# Altium PCB 21FX_revd.PcbDoc
Units mil, origin at the board's own origin, x right, y up, seen from the top; angles counter-clockwise.
Board outline 2089 x 1245 mil, 2 copper layers (Top Layer, Bottom Layer); 44 components, 68 nets, 346 pads, 0 vias.
Unrouted connection lines stored in the file: 133.
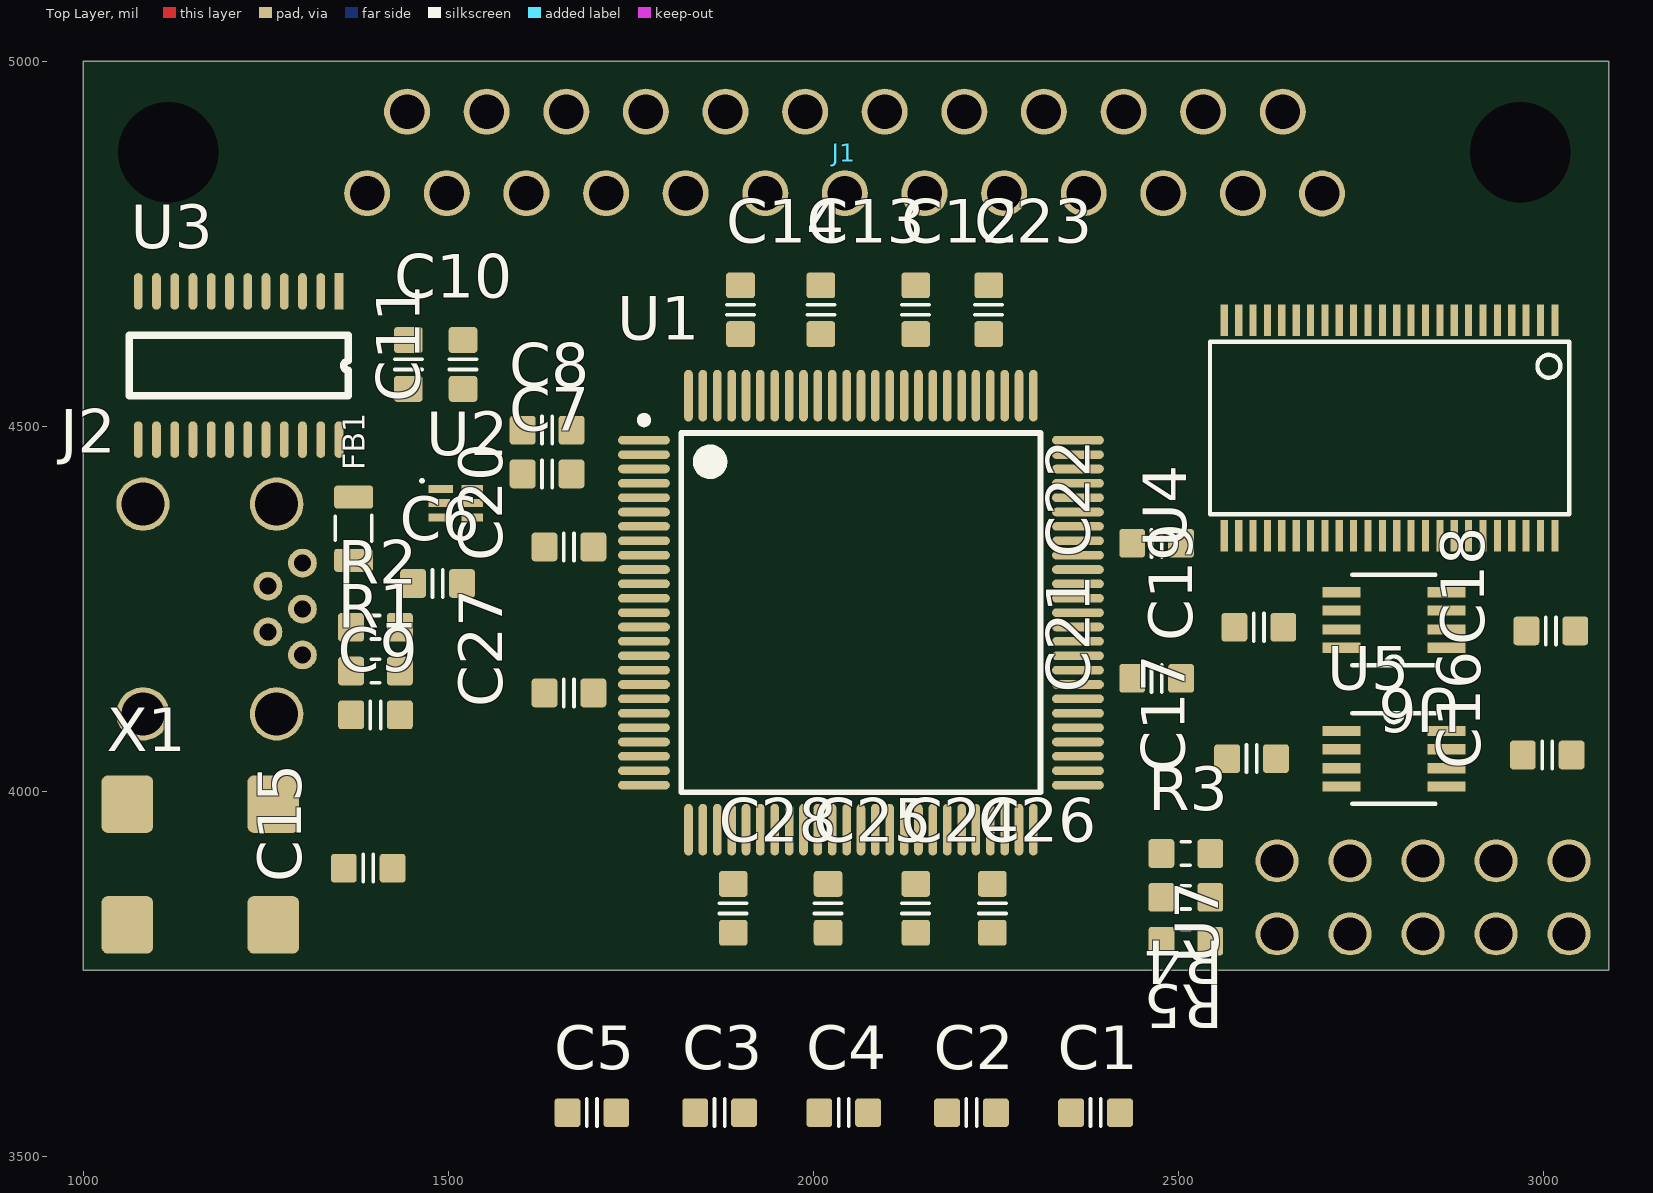
[diagram p0: Top Layer view]
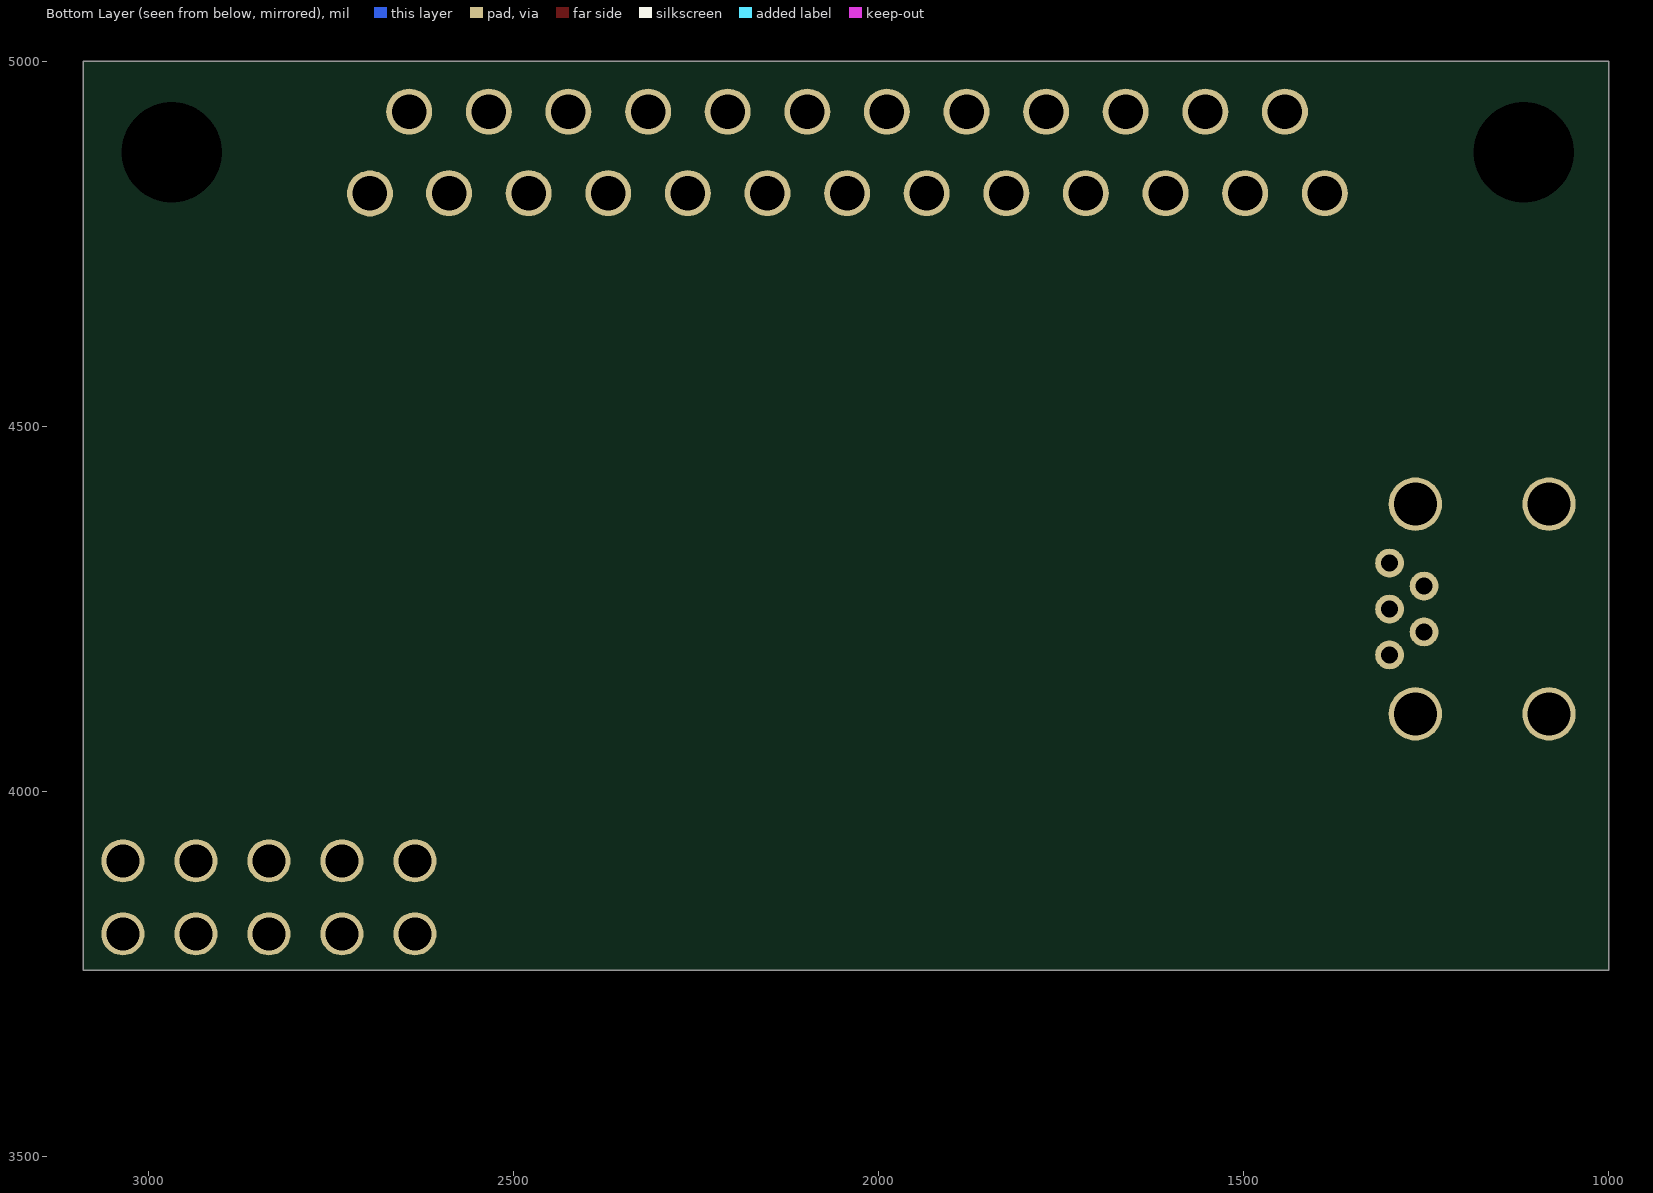
[diagram p1: Bottom Layer view, seen from below]

## Layer stack, top to bottom
Top Solder: solder mask 0.4, Solder Resist, Dk 3.5
Top Layer: signal copper 1.4
Dielectric 1: dielectric 12.6, FR-4, Dk 4.8
Bottom Layer: signal copper 1.4
Bottom Solder: solder mask 0.4, Solder Resist, Dk 3.5

## Board outline
1000,3755 3089,3755 3089,5000 1000,5000

## Design rules (kind name [scope] priority, off if disabled: settings)
Clearance [All] p1: gap=10
PolygonConnect [All] p1: connectstyle=Relief reliefconductorwidth=10 reliefentries=4 polygonreliefangle="90 Angle" airgapwidth=10
RoomDefinition 21FX_revd_power [InComponentClass('21FX_revd_power')] p1: confinementstyle=ConfineIn formatcopy=TRUE lockcomponents=FALSE outline 3830,2995 4140,2995 4140,3265 3830,3265
RoomDefinition 21FX_revd [InComponentClass('21FX_revd')] p2: confinementstyle=ConfineIn formatcopy=TRUE lockcomponents=FALSE outline 3450,3910 3720,3910 3720,4970 3450,4970
RoutingVias [All] p1: holewidth=28 width=50 viastyle="Through Hole" minholewidth=28 minwidth=50 maxholewidth=28 maxwidth=50
SolderMaskExpansion [All] p1: expansion=4
Width [All] p1: maxlimit=10 minlimit=10 preferedwidth=10
30 further rules are at their usual default settings.

## Classes and differential pairs
component class 21FX_revd: C20 C21 C22 C23 C24 C25 C26 C27 C28 J1 U1 U4 U5 U6 U? X1
component class 21FX_revd_power: C1 C2 C3 C4 C5 C6 C7 C8 C9 C10 C11 C12 C13 C14 C15 C16 C17 C18 C19 FB1 J2 R1 R2 R3 R4 R5 U2 U3 U7

## Components (designator, comment, footprint, x,y, rotation, side; value= is the part's Value field where it differs from the comment)
C1 "approved sub OK" CAPC1608X90N 2386.38,3560 r0 top
C2 "approved sub OK" CAPC1608X90N 2216.38,3560 r0 top
C3 "Value" CAPC1608X90N 1871.38,3560 r0 top
C4 "Value" CAPC1608X90N 2041.38,3560 r0 top
C5 "Value" CAPC1608X90N 1696.38,3560 r0 top
C6 "approved sub OK" CAPC1608X90N 1485,4285 r0 top
C7 "approved sub OK" CAPC1608X90N 1635,4435 r0 top
C8 "Value" CAPC1608X90N 1635,4495 r0 top
C9 "Value" CAPC1608X90N 1400,4105 r0 top
C10 "approved sub OK" CAPC1608X90N 1445,4585 r90 top
C11 "approved sub OK" CAPC1608X90N 1520,4585 r90 top
C12 "approved sub OK" CAPC1608X90N 2140,4660 r90 top
C13 "approved sub OK" CAPC1608X90N 2010,4660 r90 top
C14 "approved sub OK" CAPC1608X90N 1900,4660 r90 top
C15 "approved sub OK" CAPC1608X90N 1390,3895 r180 top
C16 "approved sub OK" CAPC1608X90N 3005,4050 r180 top
C17 "approved sub OK" CAPC1608X90N 2600,4045 r180 top
C18 "approved sub OK" CAPC1608X90N 3010,4220 r180 top
C19 "approved sub OK" CAPC1608X90N 2610,4225 r180 top
C20 "approved sub OK" CAPC1608X90N 1665,4335 r180 top
C21 "approved sub OK" CAPC1608X90N 2470,4155 r180 top
C22 "approved sub OK" CAPC1608X90N 2470,4340 r180 top
C23 "approved sub OK" CAPC1608X90N 2240,4660 r90 top
C24 "approved sub OK" CAPC1608X90N 2140,3840 r90 top
C25 "approved sub OK" CAPC1608X90N 2020,3840 r90 top
C26 "approved sub OK" CAPC1608X90N 2245,3840 r90 top
C27 "approved sub OK" CAPC1608X90N 1665,4135 r180 top
C28 "approved sub OK" CAPC1608X90N 1890,3840 r90 top
FB1 "Value" FBC2012N 1370,4360 r90 top
J1 "SNES_EXP_DB25" DB-25_RA_MPLUG 2806,3894 r180 top
J2 "USB_Mini-B_TH" USB_MINI-B_WURTH-TH 1300,4250 r90 top
R1 "Thick Film" RESC1608X55N 1400,4165 r0 top
R2 "Thick Film" RESC1608X55N 1400,4225 r0 top
R3 "Thick Film" RESC1608X55N 2510,3915 r0 top
R4 "Thick Film" RESC1608X55N 2510,3855 r180 top
R5 "Thick Film" RESC1608X55N 2510,3795 r180 top
U1 "5M570ZT100C5N" TQFP100_A-120_N 2065,4245 r0 top
U2 "TLV7111833DDSET" TI-DSE6_V 1510,4395 r0 top
U3 "FT240X" SSOP-24 1350,4685 r270 top
U4 "SN74LVCH16T245" TSSOP48 3045,4695 r180 top
U5 "SN74LVC2T45DCTT" SOP65P400X130-8N 2795,4045 r0 top
U6 "SN74LVC2T45DCTT" SOP65P400X130-8N 2795,4235 r180 top
U7 "ALTERA_JTAG_CONN" JTAG_CONN 3035,3905 r180 top
X1 "CTX1282CT-ND" OSCILLATOR_7x5 1160,3900 r180 top

## Footprints (in the part's own frame and the unit in brackets; to place one, negate y for a bottom-side part, rotate by r counter-clockwise, add the part's x,y. Pads: shape width x height; smd on the part's side, far side on the other; paste and mask are expansions set on the pad)
CAPC1608X90N [mm] "Chip Capacitor, Body 1.6x0.8mm, EIA 0603, IPC Medium Density"
  round 0.254 on Mech15: 0(0,0)
  rrect25% 0.9x1 smd: 1(-0.85,0) 2(0.85,0)
  Top Layer pour cut-out: -0.6,0.5 -0.4,0.7 0.4,0.7 0.6,0.5 0.6,-0.5 0.4,-0.7 -0.4,-0.7 -0.6,-0.5
  silkscreen extent -0.18,-0.48 0.18,0.48, body extent -0.85,-0.45 0.85,0.45, height 0.89
DB-25_RA_MPLUG [mm]
  round 1.6 hole 1.2: 1(2.78,-23.5) 2(5.53,-23.51) 3(8.3,-23.51) 4(11.07,-23.51) 5(13.84,-23.51) 6(16.61,-23.51) 7(19.38,-23.51) 8(22.15,-23.51) 9(24.92,-23.51) 10(27.69,-23.51) 11(30.46,-23.51) 12(33.23,-23.51) 13(36,-23.51) 14(4.145,-26.35) 15(6.915,-26.35) 16(9.685,-26.35) 17(12.455,-26.35) 18(15.225,-26.35) 19(17.995,-26.35) 20(20.765,-26.35) 21(23.535,-26.35) 22(26.305,-26.35) 23(29.075,-26.35) 24(31.845,-26.35) 25(34.615,-26.35)
  round 1.524 hole 3.5 unplated: ""(-4.12,-24.93) ""(42.92,-24.93)
  body extent -7.16,-40.59 45.87,-21.44, height 12.55
FBC2012N [mm] "Ferrite Bead Chip, Body 2.0x1.2mm, 0805, IPC Medium Density"
  round 0.508 on Mech15: 0(0,0)
  rrect25% 0.8x1.35 smd: 1(-1.1,0) 2(1.1,0)
  silkscreen extent -0.43,-0.64 0.46,0.64, body extent -1,-0.62 1,0.63, height 0.9
JTAG_CONN [mm]
  round 1.5 hole 1.143: 1(0,0) 2(0,2.54) 3(2.54,0) 4(2.54,2.54) 5(5.08,0) 6(5.08,2.54) 7(7.62,0) 8(7.62,2.54) 9(10.16,0) 10(10.16,2.54)
  body extent -1.27,-1.27 11.43,3.81, height 8.54
OSCILLATOR_7x5 [mm] "SMD Crystal 4-lead leadless package"
  rrect25% 1.8x2 smd mask+0.075: 1(-2.54,-2.1) 2(2.54,-2.1) 3(2.54,2.1) 4(-2.54,2.1)
  body extent -3.55,-2.5 3.45,2.5, height 1.65
RESC1608X55N [mm] "Chip Resistor, Body 1.6x0.8mm, EIA 0603, IPC Medium Density"
  round 0.254 on Mech15: 0(0,0)
  rrect25% 0.9x1 smd: 1(-0.85,0) 2(0.85,0)
  Top Layer pour cut-out: -0.6,0.5 -0.4,0.7 0.4,0.7 0.6,0.5 0.6,-0.5 0.4,-0.7 -0.4,-0.7 -0.6,-0.5
  silkscreen extent -0.15,-0.41 0.15,0.41, body extent -0.87,-0.47 0.88,0.48, height 0.54
SOP65P400X130-8N [mil]
  rect 52x14 smd paste-1000 mask-1000: 1(-72,38) 2(-72,13) 3(-72,-13) 4(-72,-38) 5(72,-38) 6(72,-13) 7(72,13) 8(72,38)
  silkscreen extent -57,-62 57,62
SSOP-24 [mil]
  rect 50x12 smd: 1(0,0)
  oval 50x12 smd: 2(0,-25) 3(0,-50) 4(0,-75) 5(0,-100) 6(0,-125) 7(0,-150) 8(0,-175) 9(0,-200) 10(0,-225) 11(0,-250) 12(0,-275) 13(203,-275) 14(203,-250) 15(203,-225) 16(203,-200) 17(203,-175) 18(203,-150) 19(203,-125) 20(203,-100) 21(203,-75) 22(203,-50) 23(203,-25) 24(203,0)
  silkscreen extent 60,-288 143,13, body extent 24,-295 179,20, height 47
TI-DSE6_V [mm] "SON, 6-Leads, Body 1.5x1.5mm, Pitch 0.5mm"
  rect 0.85x0.28 smd: 1(-0.525,0.5)
  rect 0.75x0.28 smd: 2(-0.575,0) 3(-0.575,-0.5) 4(0.575,-0.5) 5(0.575,0) 6(0.575,0.5)
  silkscreen extent -1.22,0.73 -1.12,0.82, body extent -0.75,-0.75 0.75,0.75, height 0.8
TQFP100_A-120_N [mm] "Thin QFP, 100-Leads, Body 14x14mm, Pitch 0.5mm, IPC Medium Density"
  oval 1.8x0.3 smd: 1(-7.55,6) 2(-7.55,5.5) 3(-7.55,5) 4(-7.55,4.5) 5(-7.55,4) 6(-7.55,3.5) 7(-7.55,3) 8(-7.55,2.5) 9(-7.55,2) 10(-7.55,1.5) 11(-7.55,1) 12(-7.55,0.5) 13(-7.55,0) 14(-7.55,-0.5) 15(-7.55,-1) 16(-7.55,-1.5) 17(-7.55,-2) 18(-7.55,-2.5) 19(-7.55,-3) 20(-7.55,-3.5) 21(-7.55,-4) 22(-7.55,-4.5) 23(-7.55,-5) 24(-7.55,-5.5) 25(-7.55,-6) 51(7.55,-6) 52(7.55,-5.5) 53(7.55,-5) 54(7.55,-4.5) 55(7.55,-4) 56(7.55,-3.5) 57(7.55,-3) 58(7.55,-2.5) 59(7.55,-2) 60(7.55,-1.5) 61(7.55,-1) 62(7.55,-0.5) 63(7.55,0) 64(7.55,0.5) 65(7.55,1) 66(7.55,1.5) 67(7.55,2) 68(7.55,2.5) 69(7.55,3) 70(7.55,3.5) 71(7.55,4) 72(7.55,4.5) 73(7.55,5) 74(7.55,5.5) 75(7.55,6)
  oval 0.3x1.8 smd: 26(-6,-7.55) 27(-5.5,-7.55) 28(-5,-7.55) 29(-4.5,-7.55) 30(-4,-7.55) 31(-3.5,-7.55) 32(-3,-7.55) 33(-2.5,-7.55) 34(-2,-7.55) 35(-1.5,-7.55) 36(-1,-7.55) 37(-0.5,-7.55) 38(0,-7.55) 39(0.5,-7.55) 40(1,-7.55) 41(1.5,-7.55) 42(2,-7.55) 43(2.5,-7.55) 44(3,-7.55) 45(3.5,-7.55) 46(4,-7.55) 47(4.5,-7.55) 48(5,-7.55) 49(5.5,-7.55) 50(6,-7.55) 76(6,7.55) 77(5.5,7.55) 78(5,7.55) 79(4.5,7.55) 80(4,7.55) 81(3.5,7.55) 82(3,7.55) 83(2.5,7.55) 84(2,7.55) 85(1.5,7.55) 86(1,7.55) 87(0.5,7.55) 88(0,7.55) 89(-0.5,7.55) 90(-1,7.55) 91(-1.5,7.55) 92(-2,7.55) 93(-2.5,7.55) 94(-3,7.55) 95(-3.5,7.55) 96(-4,7.55) 97(-4.5,7.55) 98(-5,7.55) 99(-5.5,7.55) 100(-6,7.55)
  silkscreen extent -7.67,-6.25 6.25,6.82, body extent -7,-7 7,7, height 1.2
TSSOP48 [mm]
  rect 0.25x1.1 smd paste-25.4 mask-25.4: 1(0.75,1.25) 2(1.25,1.25) 3(1.75,1.25) 4(2.25,1.25) 5(2.75,1.25) 6(3.25,1.25) 7(3.75,1.25) 8(4.25,1.25) 9(4.75,1.25) 10(5.25,1.25) 11(5.75,1.25) 12(6.25,1.25) 13(6.75,1.25) 14(7.25,1.25) 15(7.75,1.25) 16(8.25,1.25) 17(8.75,1.25) 18(9.25,1.25) 19(9.75,1.25) 20(10.25,1.25) 21(10.75,1.25) 22(11.25,1.25) 23(11.75,1.25) 24(12.25,1.25) 25(12.25,8.75) 26(11.75,8.75) 27(11.25,8.75) 28(10.75,8.75) 29(10.25,8.75) 30(9.75,8.75) 31(9.25,8.75) 32(8.75,8.75) 33(8.25,8.75) 34(7.75,8.75) 35(7.25,8.75) 36(6.75,8.75) 37(6.25,8.75) 38(5.75,8.75) 39(5.25,8.75) 40(4.75,8.75) 41(4.25,8.75) 42(3.75,8.75) 43(3.25,8.75) 44(2.75,8.75) 45(2.25,8.75) 46(1.75,8.75) 47(1.25,8.75) 48(0.75,8.75)
  silkscreen extent 0.25,2 12.75,8
USB_MINI-B_WURTH-TH [mm]
  round 1 hole 0.6: 1(1.6,0) 2(0.8,1.2) 3(0,0) 4(-0.8,1.2) 5(-1.6,0)
  round 1.856 hole 1.5 mask+0.102: 6(-3.65,0.9) 6(-3.65,5.55) 6(3.65,0.9) 6(3.65,5.55)
  body extent -4.1,-0.13 4.05,8.7, height 4.05

## Part data
C1: library part CAPC_10n_0603_X7R_50V_10%, "Capacitor SMD Cer 10nF 10% 50V X7R 0603"
C2 C6 C7 C10 C11 C12 C13 C14 C15 C16 C17 C18 C19 C20 C21 C22 C23 C24 C25 C26 C27 C28: library part CAPC_100n_0603_X7R_50V_10%, "Capacitor SMD Cer 100nF 10% 50V X7R 0603"
C3: library part CAPT_4_7u_0603_10V, "Capacitor SMD 4.7uF 10% 10V"
C4 C5: library part CAPT_1u_0603_10V, "Capacitor SMD 1uF 10% 10V"
C8 C9: library part CAPC_47p_0603_X7R_50V_5%, "Capacitor SMD Cer 47pF 5% 50V X7R 0603"
FB1: library part FERRITE_600-100MHz_0805, "Ferrite bead 600 Ohm at 100 MHz 1.5A 0805 SMD"
J2: "Connector TH USB Type Mini-B"
R1 R2: library part RES_10K_0603_5%, "Resistor SMD chip 10k Ohm 0.1W 5% 0603"
R3: library part RES_1K_0603_5%, "Resistor SMD chip 1k Ohm 0.1W 5% 0603"
R4 R5: library part RES_27R_0603_5%, "Resistor SMD chip 27 Ohm 0.1W 5% 0603"
U1: "MAX V 1.8V CPLD, 74 IOs, 570 Logic Elements, 100-Pin TQFP, Commercial Temperature, Speed Grade 5, Pb-Free"
U2: "Dual Output High PSRR LDO, 200 mA, Fixed 1.8, 3.3 V Output, 2 to 5.5 V Input, 6-pin WSON (DSE), -40 to 125 degC, Green (RoHS & no Sb/Br)"
X1: library part CTX1282CT-ND_50MHz, "50 MHz 3.3v Oscillator"

## Nets (pads, with @x,y where several pads share a name; then routed paths per layer and width w, separated by ;. In a path a pad name is that pad's centre, name@x,y a point inside that pad or via, vN(x,y) a via of type N, cw(c..) or ccw(c..) an arc to the next point about the centre after c; other vN are vias at no path point)
CBUS5: U1.2 U3.23
CBUS6: U1.3 U3.22
CLK_50: U1.62 U1.64 X1.3
D0: U1.89 U3.24
D0_5V: J1.11
D1: U1.87 U3.4
D1_5V: J1.12
D2: U1.86 U3.2
D2_5V: J1.13
D3: U1.85 U3.9
D3_5V: J1.14
D4: U1.84 U3.1
D4_5V: J1.15
D5: U1.83 U3.7
D5_5V: J1.16
D6: U1.82 U3.8
D6_5V: J1.17
D7: U1.81 U3.5
D7_5V: J1.18
D_DIR: U1.76
D_OEN: U1.75
GND: C1.2 C2.2 C3.2 C4.2 C5.2 C6.2 C7.2 C8.2 C9.2 C10.2 C11.2 C12.2 C13.2 C14.2 C15.2 C16.2 C17.2 C18.2 C19.2 C20.2 C21.2 C22.2 C23.2 C24.2 C25.2 C26.2 C27.2 C28.2 J1.23 J2.5 J2.6 R3.1 U1.8 U1.10 U1.11 U1.32 U1.37 U1.46 U1.60 U1.65 U1.79 U1.90 U1.93 U1.95 U2.4 U3.6 U3.19 U6.4 U6.5 U7.2 U7.10
IR_DIR: U1.74
IRQ_N: U1.73
IRQ_N_5V: J1.25
NetC1_1: C1.1 FB1.1 J2.1
NetR1_2: R1.2 U1.22 U7.5
NetR2_2: R2.2 U1.23 U7.9
NetR3_2: R3.2 U1.24 U7.1
NetR4_1: R4.1 U3.14
NetR5_1: R5.1 U3.13
NetU1_25: U1.25 U7.3
PA0: U1.1 U4.47
PA0_5V: J1.1
PA1: U1.100
PA1_5V: J1.2
PA2: U1.99
PA2_5V: J1.3
PA3: U1.98
PA3_5V: J1.4
PA4: U1.97
PA4_5V: J1.5
PA5: U1.96
PA5_5V: J1.6
PA6: U1.92
PA6_5V: J1.7
PA7: U1.91
PA7_5V: J1.8
PA_DIR: U1.78
PA_OEN: U1.77
PARD_N: U1.70
PARD_N_5V: J1.10
PAWR_N: U1.71
PAWR_N_5V: J1.9
RD#: U1.61 U3.11
RST_N: U1.72
RST_N_5V: J1.19 U5.6
RXF#: U1.68 U3.21
SI/WU#: U1.66 U3.10
SNES_VCC: C20.1 C21.1 C24.1 C25.1 J1.20
TXE#: U1.67 U3.20
USB3V3: C7.1 U3.3 U3.15 U3.16
USB5V: C2.1 C3.1 C6.1 FB1.2 U2.1 U2.2 U2.3 U3.18
USBDM: C8.1 J2.2 R4.2
USBDP: C9.1 J2.3 R5.2
VCC1.8: C4.1 C16.1 C17.1 C18.1 C19.1 U1.13 U1.39 U1.63 U1.88 U2.6
VCC3.3: C5.1 C10.1 C11.1 C12.1 C13.1 C14.1 C15.1 C22.1 C23.1 C26.1 C27.1 C28.1 R1.1 R2.1 U1.9 U1.31 U1.45 U1.59 U1.80 U1.94 U2.5 U7.4 X1.1 X1.2 X1.4
WR#: U1.58 U3.12
pads on no net: C1.0 C2.0 C3.0 C4.0 C5.0 C6.0 C7.0 C8.0 C9.0 C10.0 C11.0 C12.0 C13.0 C14.0 C15.0 C16.0 C17.0 C18.0 C19.0 C20.0 C21.0 C22.0 C23.0 C24.0 C25.0 C26.0 C27.0 C28.0 FB1.0 J1. J1.21 J1.22 J1.24 J2.4 R1.0 R2.0 R3.0 R4.0 R5.0 U1.4 U1.5 U1.6 U1.7 U1.12 U1.14 U1.15 U1.16 U1.17 U1.18 U1.19 U1.20 U1.21 U1.26 U1.27 U1.28 U1.29 U1.30 U1.33 U1.34 U1.35 U1.36 U1.38 U1.40 U1.41 U1.42 U1.43 U1.44 U1.47 U1.48 U1.49 U1.50 U1.51 U1.52 U1.53 U1.54 U1.55 U1.56 U1.57 U1.69 U3.17 U4.1 U4.2 U4.3 U4.4 U4.5 U4.6 U4.7 U4.8 U4.9 U4.10 U4.11 U4.12 U4.13 U4.14 U4.15 U4.16 U4.17 U4.18 U4.19 U4.20 U4.21 U4.22 U4.23 U4.24 U4.25 U4.26 U4.27 U4.28 U4.29 U4.30 U4.31 U4.32 U4.33 U4.34 U4.35 U4.36 U4.37 U4.38 U4.39 U4.40 U4.41 U4.42 U4.43 U4.44 U4.45 U4.46 U4.48 U5.1 U5.2 U5.3 U5.4 U5.5 U5.7 U5.8 U6.1 U6.2 U6.3 U6.6 U6.7 U6.8 U7.6 U7.7 U7.8